# Altium PCB trace_7.PcbDoc
Units mil, origin at the board's own origin, x right, y up, seen from the top; angles counter-clockwise.
Board outline 2820 x 2015 mil, 2 copper layers (Top Layer, Bottom Layer); 4 components, 2 nets, 28 pads, 0 vias.
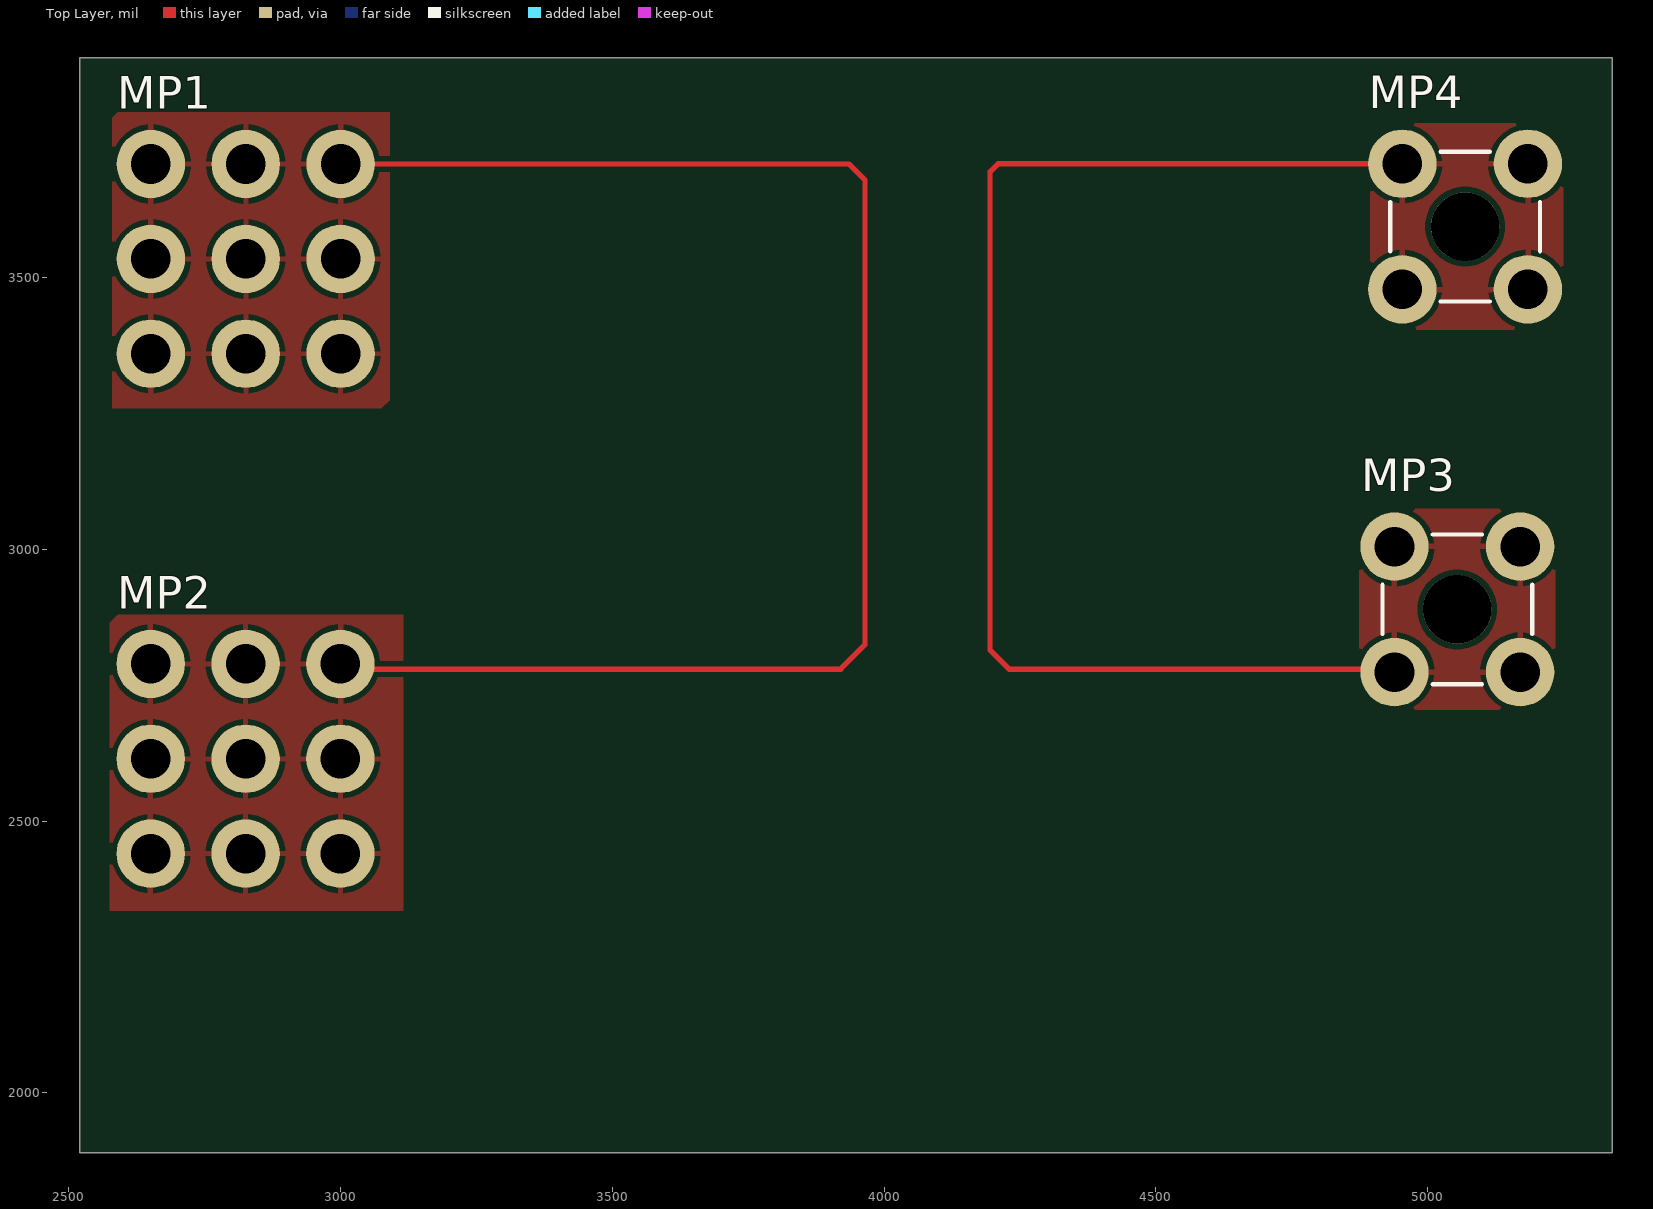
[diagram p0: Top Layer view]
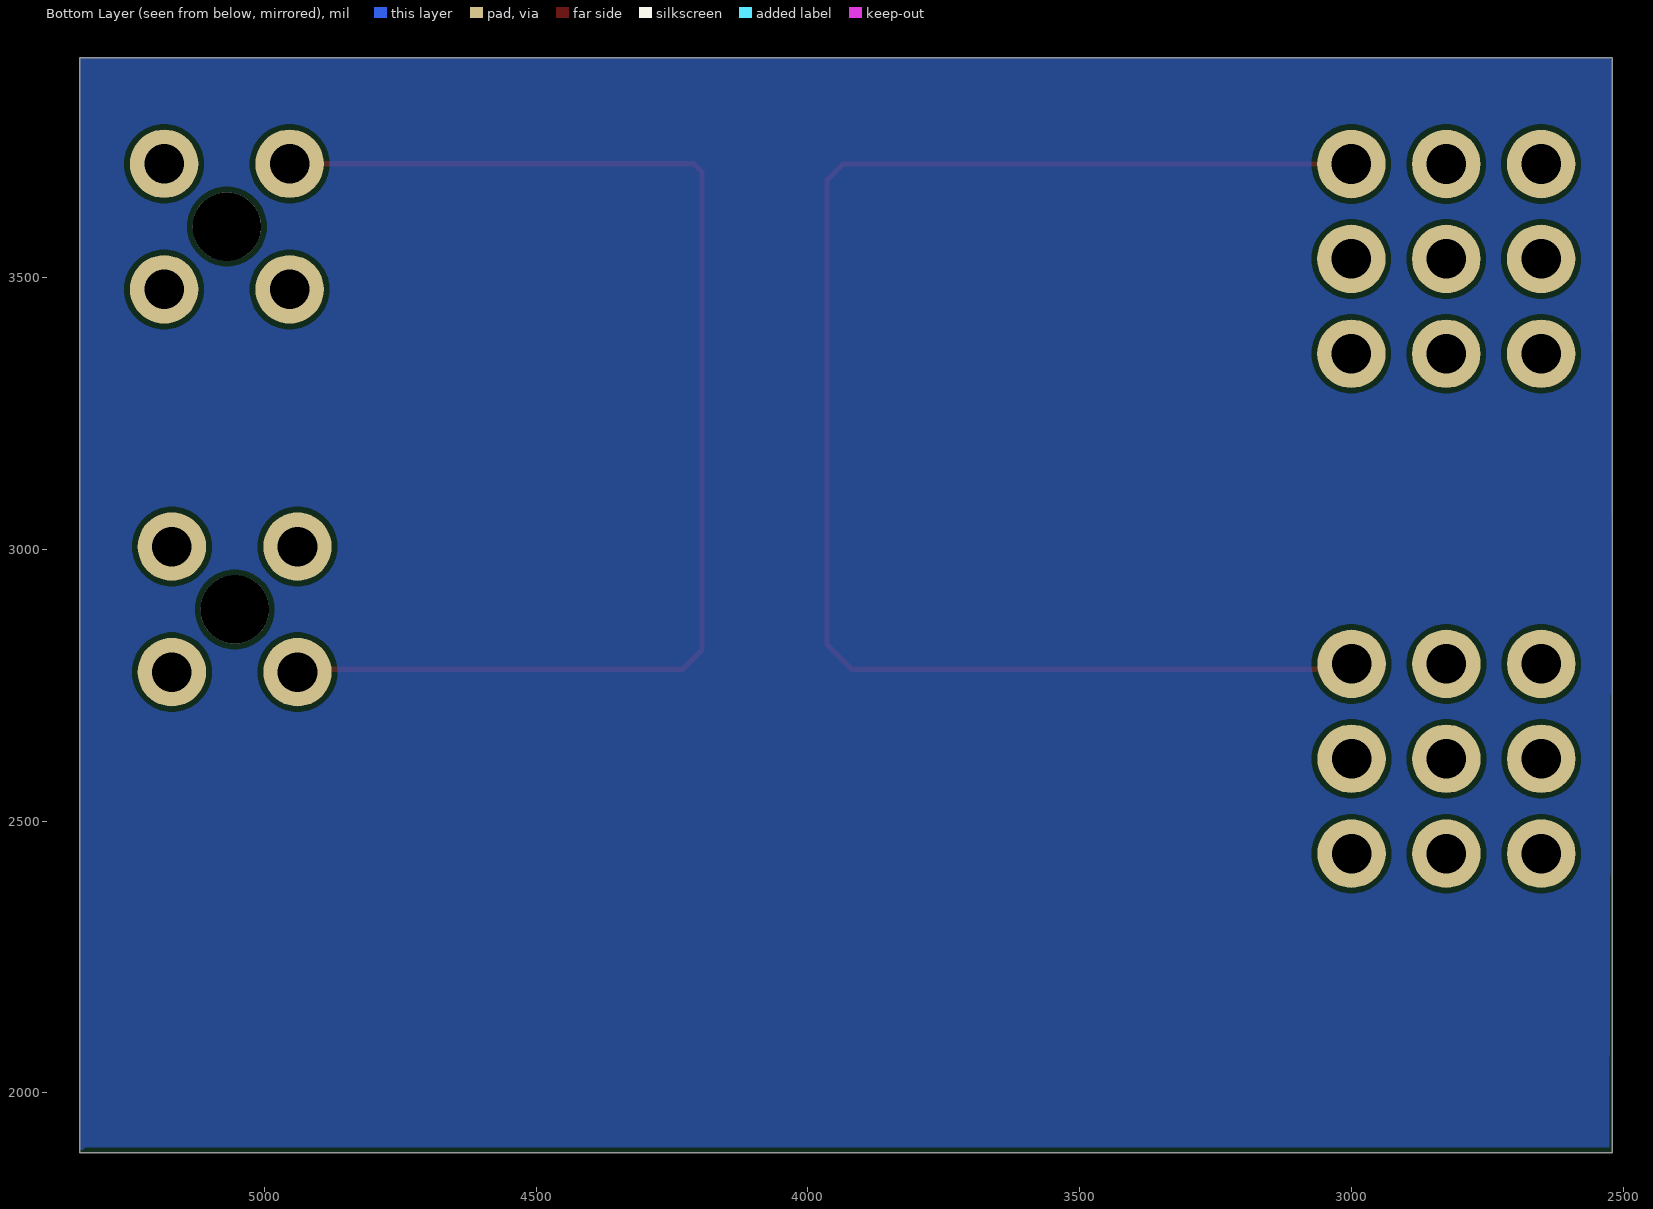
[diagram p1: Bottom Layer view, seen from below]
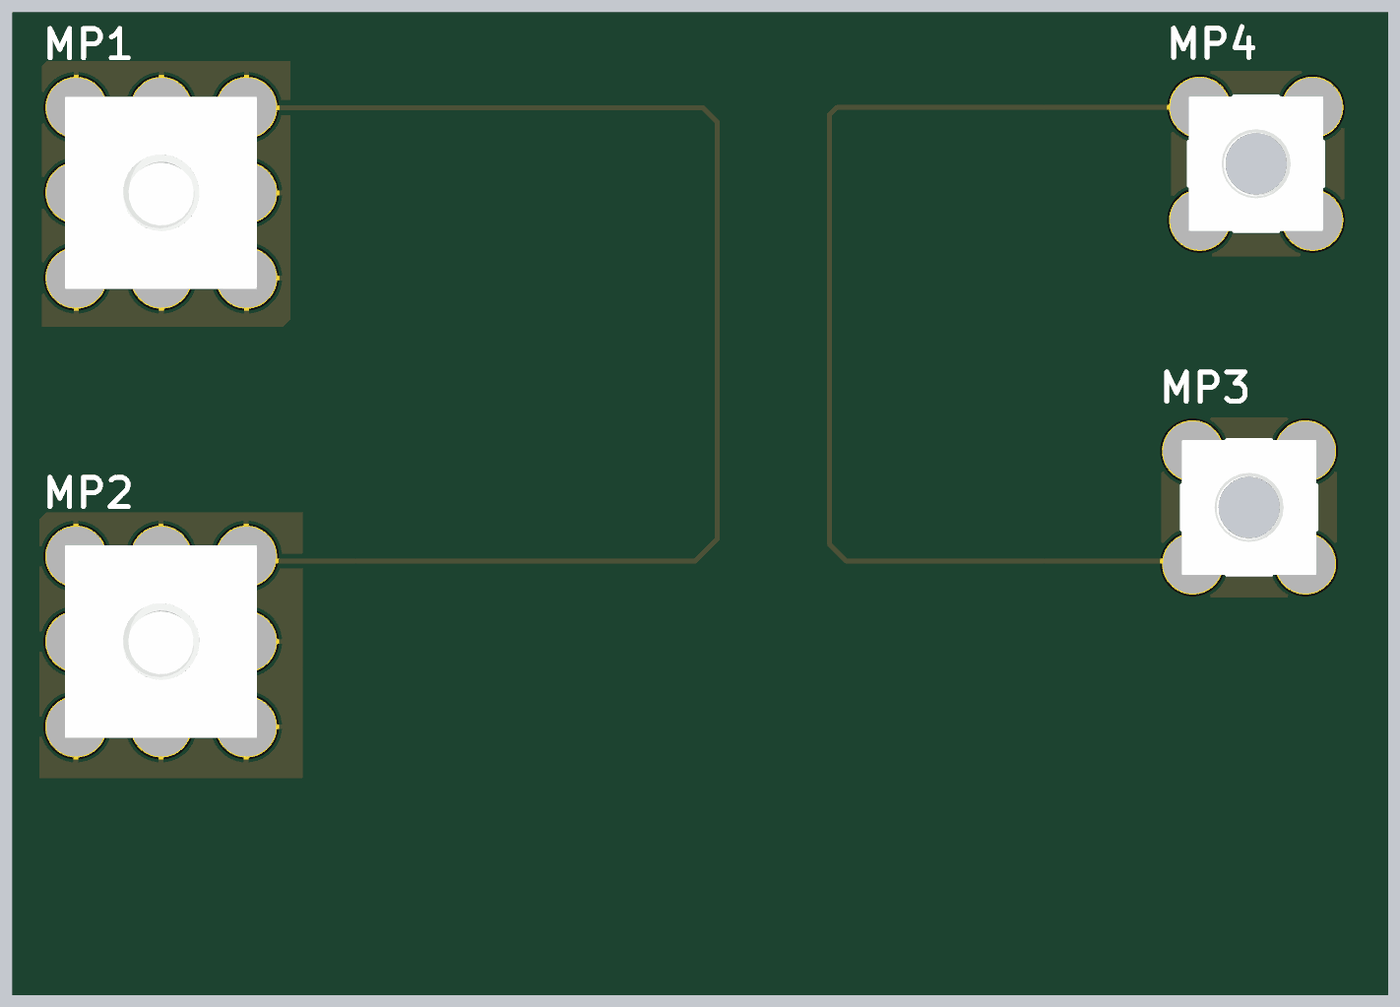
[diagram p2: 3D render of the assembled board from above, using the file's embedded part models]

## Layer stack, top to bottom
Top Solder: solder mask 0.4, Solder Resist, Dk 3.5
Top Layer: signal copper 1.4
Dielectric 1: dielectric 12.6, FR-4, Dk 4.8
Bottom Layer: signal copper 1.4
Bottom Solder: solder mask 0.4, Solder Resist, Dk 3.5

## Board outline
2520,1890 5340,1890 5340,3905 2520,3905

## Design rules (kind name [scope] priority, off if disabled: settings)
Clearance [All] p1: gap=10 ignorepadtopadclearanceinfootprint=FALSE except(0: Arc-Hole Track-Hole SMDPad-Hole THPad-Hole Via-Hole Fill-Hole Poly-Hole Region-Hole Text-Hole)
PolygonConnect [All] p1: connectstyle=Relief reliefconductorwidth=10 reliefentries=4 polygonreliefangle="90 Angle" airgapwidth=10
RoutingVias [All] p1: holewidth=28 width=50 viastyle="Through Hole" minholewidth=28 minwidth=50 maxholewidth=28 maxwidth=50
SolderMaskExpansion [All] p1: expansion=4 istentingtop=FALSE
Width [All] p1: maxlimit=10 minlimit=10 preferedwidth=10
30 further rules are at their usual default settings.

## Components (designator, comment, footprint, x,y, rotation, side; value= is the part's Value field where it differs from the comment)
MP1 "74651194R" "WURTH 74651194" 2825.39,3535 r270 top
MP2 "74651194R" "WURTH 74651194" 2825,2615 r270 top
MP3 "74650073R" "WURTH 74650073" 5055,2890 r0 top
MP4 "74650073R" "WURTH 74650073" 5069.45,3594.45 r0 top

## Footprints (in the part's own frame and the unit in brackets; to place one, negate y for a bottom-side part, rotate by r counter-clockwise, add the part's x,y. Pads: shape width x height; smd on the part's side, far side on the other; paste and mask are expansions set on the pad)
"WURTH 74650073" [mm] "REDCUBE THR with internal thread, M3x2.5mm, through"
  round 3.2 hole 1.85: 1(-2.935,-2.935) 1(-2.935,2.935) 1(2.935,-2.935) 1(2.935,2.935)
  round 3.2 hole 3.2 unplated: MH1(0,0)
  silkscreen extent -3.5,-3.5 3.5,3.5, body extent -3.5,-3.5 3.5,3.5, height 3
"WURTH 74651194" [mm] "Shank, THR, 9 pins, 10x10mm, M4, thread 5mm"
  round 3.2 hole 1.85: 1(-4.435,4.435) 1(-4.435,0) 1(-4.435,-4.435) 1(0,4.435) 1(0,0) 1(0,-4.435) 1(4.435,4.435) 1(4.435,0) 1(4.435,-4.435)
  body extent -5,-5.01 5,4.99, height 9

## Part data
MP1 MP2: "TERM REDCUBE 9PIN PCB", Current Rating (Amps)="85 A", Manufacturer="Würth Elektronik", Supplier Part Number 1=732-10907-1-ND, ComponentLink1Description=Datasheet, ComponentLink1URL=https://katalog.we-online.de/em/datasheet/74651194R.pdf, ComponentLink2Description="DigiKey Link", ComponentLink2URL=https://www.digikey.com/en/products/detail/würth-elektronik/74651194R/6644003, lastupdated="07/08/2022 21:20:29", Lifecycle Status=Active, Minimum Order=1, Mounting Type="Through Hole", Number of Pins=9, Packaging=TapeAndReel, Part Number=74651194R, Part Status=Active, price=2.24, Series="REDCUBE WP-THRSH", Supplier 1=DigiKey, Terminal Type="Shank Terminal", Termination=Solder
MP3 MP4: "TERM REDCUBE M3 4PIN PCB", Current Rating (Amps)="50 A", Manufacturer="Würth Elektronik", Supplier Part Number 1=732-10882-1-ND, ComponentLink1Description=Datasheet, ComponentLink1URL=https://katalog.we-online.de/em/datasheet/74650073R.pdf, ComponentLink2Description="DigiKey Link", ComponentLink2URL=https://www.digikey.com/en/products/detail/würth-elektronik/74650073R/6643978, Features="Screw not Included", lastupdated="07/08/2022 20:38:54", Lifecycle Status=Active, Minimum Order=1, Mounting Type="Through Hole", Number of Pins=4, Packaging=TapeAndReel, Part Number=74650073R, Part Status=Active, price=2.28, Screw Size=M3, Series="REDCUBE WP-THRBU", Supplier 1=DigiKey, Terminal Type="Screw Terminal, Power Tap", Termination=Solder

## Nets (pads, with @x,y where several pads share a name; then routed paths per layer and width w, separated by ;. In a path a pad name is that pad's centre, name@x,y a point inside that pad or via, vN(x,y) a via of type N, cw(c..) or ccw(c..) an arc to the next point about the centre after c; other vN are vias at no path point)
Net-1: MP1.1 MP2.1 | length 2820.3
  Top Layer w10: MP2.1@2999.61,2789.61 3009.21,2780 3920,2780 3965,2825 3965,3680 3935.39,3709.61 MP1.1@3000,3709.61
Net-2: MP3.1 MP4.1 | length 2406.4
  Top Layer w10: MP3.1@4939.45,2774.45 4933.9,2780 4230,2780 4195,2815 4195,3695 4210,3710 MP4.1@4953.9,3710
pads on no net: MP3.MH1 MP4.MH1

## Polygon pours and split planes (outlines as drawn)
no net on Bottom Layer "L02_NONET_P000" (solid, pour order 0): 2520,3900 2525,3905 5340,3905 5340,1890 5330,1900 2525,1900
Net-1 on Top Layer "L01_NET-1_P004" (solid, pour order 4): 2590,2880 3115,2880 3115,2355 3115,2335 3035,2335 2575,2335 2575,2865
Net-1 on Top Layer "L01_NET-1_P003" (solid, pour order 3): 2580,3795 2590,3805 3090,3805 3090,3275 3075,3260 2580,3260 2580,3795 2570,3805
Net-2 on Top Layer "L01_NET-2_P002" (solid, pour order 2): 4875,3080 4880,3075 5235,3075 5235,2715 5240,2710 5235,2705 4875,2705 4875,3075
Net-2 on Top Layer "L01_NET-2_P001" (solid, pour order 1): 4890,3780 4895,3785 5250,3785 5250,3405 4895,3405 4895,3760